# Altium PCB BLE_V3.PcbDoc
Units mil, origin at the board's own origin, x right, y up, seen from the top; angles counter-clockwise.
Board outline 3356.49 x 1990.35 mil, 2 copper layers (Top Layer, Bottom Layer); 15 components, 14 nets, 76 pads, 0 vias.
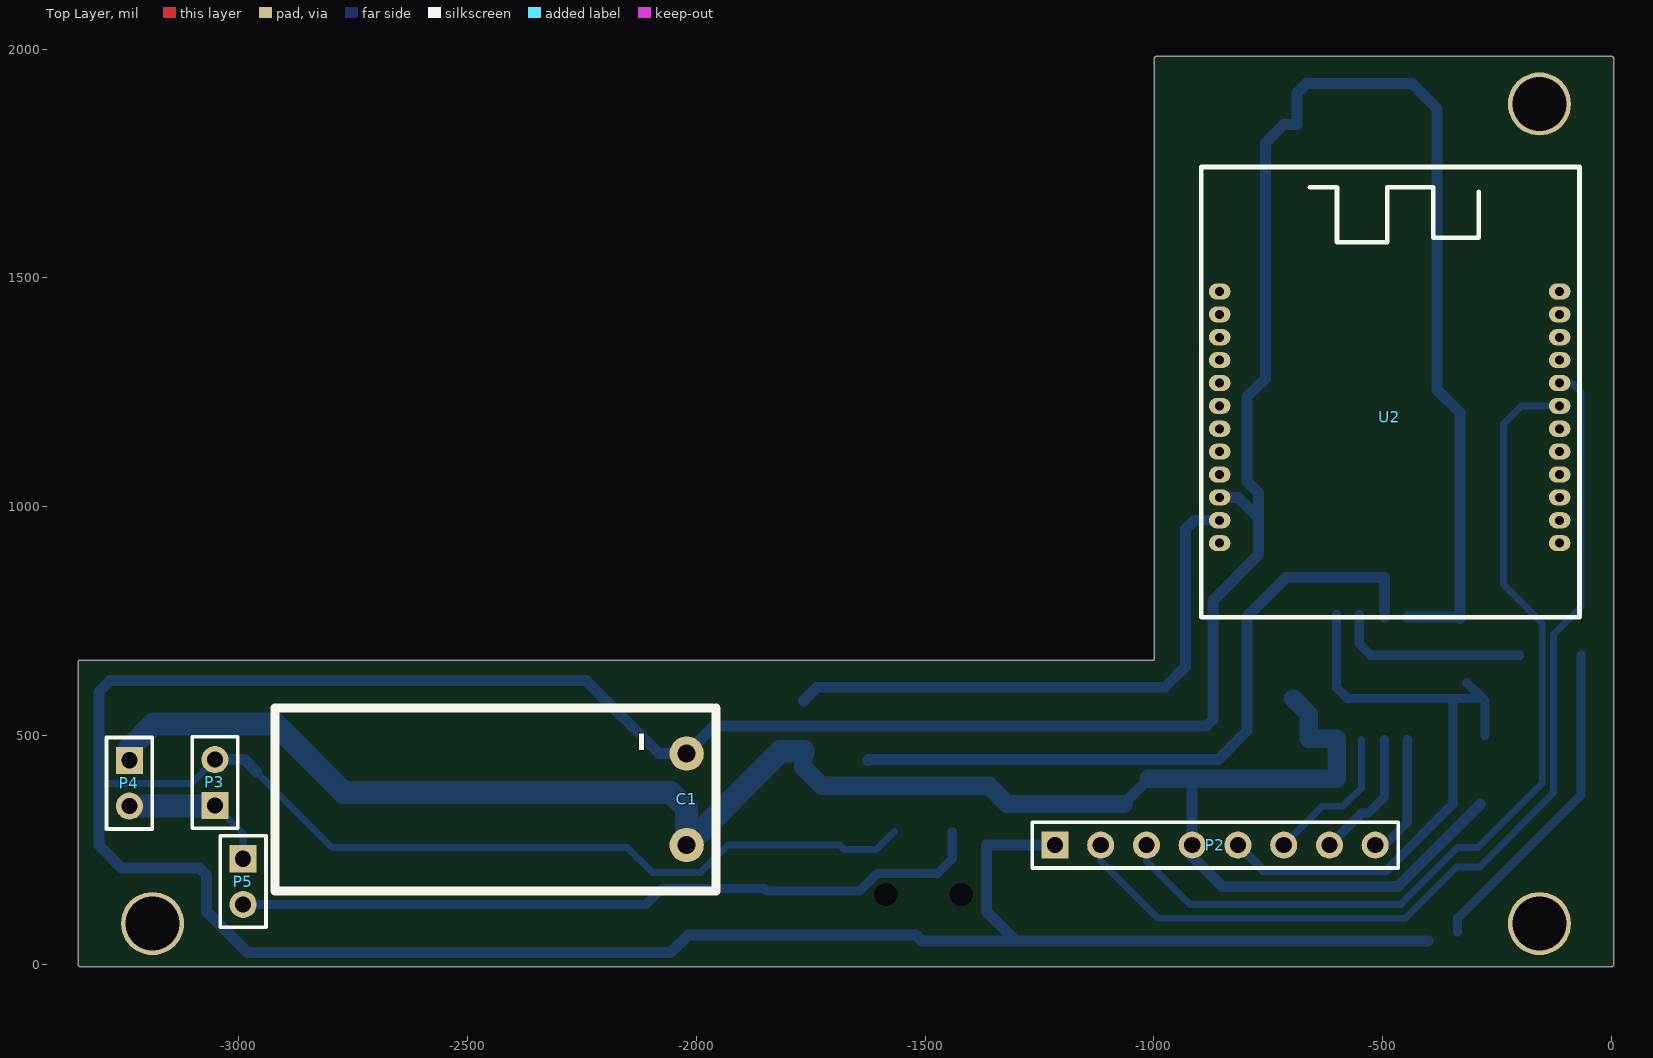
[diagram p0: Top Layer view]
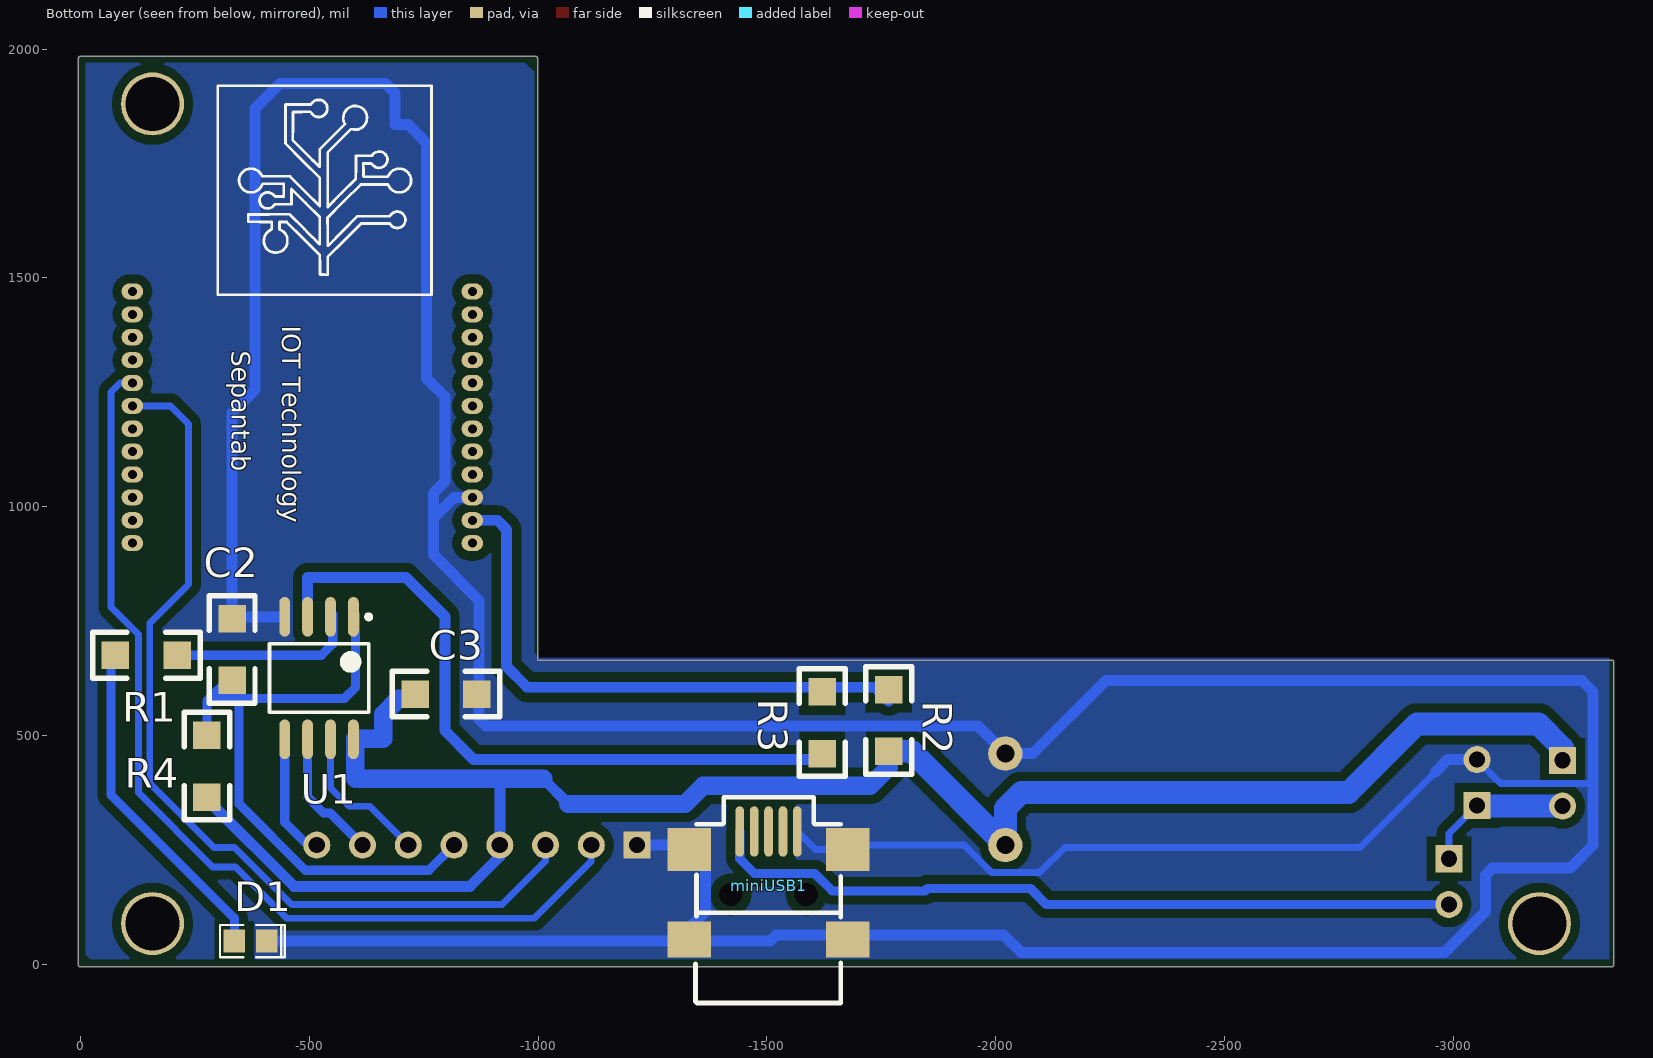
[diagram p1: Bottom Layer view, seen from below]

## Layer stack, top to bottom
Top Solder: solder mask 0.4, Solder Resist, Dk 3.5
Top Layer: signal copper 1.4
Dielectric 1: dielectric 12.6, FR-4, Dk 4.8
Bottom Layer: signal copper 1.4
Bottom Solder: solder mask 0.4, Solder Resist, Dk 3.5

## Board outline
-3351.02,-0.98 -3351.02,659.45 cw(c-3346,659.45) -3346,664.46 -998.65,664.46 -998.65,1979.33 cw(c-993.64,1979.33) -993.64,1984.35 -0.53,1984.35 cw(c-0.53,1979.33) 3.48,1982.35 cw(c0.46,1978.35) 5.47,1978.35 5.47,-0.98 cw(c0.46,-0.98) 0.46,-6 -3346,-6 cw(c-3346,-0.98)

## Design rules (kind name [scope] priority, off if disabled: settings)
Clearance [All] p1: gap=10 ignorepadtopadclearanceinfootprint=FALSE
PolygonConnect [All] p1: connectstyle=Direct reliefconductorwidth=10 reliefentries=4 polygonreliefangle="90 Angle" airgapwidth=10
RoutingVias [All] p1: holewidth=28 width=50 viastyle="Through Hole" minholewidth=28 minwidth=50 maxholewidth=28 maxwidth=50
SolderMaskExpansion [All] p1: expansion=4
Width [All] p1: maxlimit=100 minlimit=10 preferedwidth=20
30 further rules are at their usual default settings.

## Components (designator, comment, footprint, x,y, rotation, side; value= is the part's Value field where it differs from the comment)
C1 "2200UF,16V" RB0.2/0.4-horizantal -2021,260 r270 top
C2 "100NF" 1206 -331,755 r270 bottom value=100pF
C3 "100NF" 1206 -866,590 r0 bottom value=100pF
D1 "LED2" LED-0805 -336,50 r180 bottom
miniUSB1 "N.M." MINI-USB -1440.53,289.84 r180 bottom
P2 "Header 8" HDR1X8 -1216,260 r0 top
P3 "Header 2-battery" HDR1X2 -3052.02,346.85 r90 top
P4 "Header 2-key" HDR1X2 -3239.03,445.28 r270 top
P5 "Header 2-key" HDR1X2 -2990.49,230.16 r270 top
R1 "1K" 1206 -76,675 r180 bottom
R2 "0" 1206 -1766,465 r90 bottom value=1K
R3 "0" 1206 -1621,595 r270 bottom value=1K
R4 "10K" 1206 -276,500 r270 bottom value=1K
U1 "ATtiny45" 8S2_N -521,625 r270 bottom
U2 "NRF52832_1_socket" NRF51822-1-scoket -856,1470 r0 top

## Footprints (in the part's own frame and the unit in brackets; to place one, negate y for a bottom-side part, rotate by r counter-clockwise, add the part's x,y. Pads: shape width x height; smd on the part's side, far side on the other; paste and mask are expansions set on the pad)
8S2_N [mm] "SOP, 8-Leads, Body 5.3x5.3mm, Pitch 1.27mm, IPC Medium Density"
  oval 2.2x0.6 smd: 1(-3.4,1.905) 2(-3.4,0.635) 3(-3.4,-0.635) 4(-3.4,-1.905) 5(3.4,-1.905) 6(3.4,-0.635) 7(3.4,0.635) 8(3.4,1.905)
  silkscreen extent -3.52,-2.75 1.9,2.88, body extent -2.73,-2.75 2.73,2.75, height 2.16
1206 [mil]
  rect 60x60 smd paste-78.74: 1(0,0) 2(135,0)
  silkscreen extent -50,-50 185,50, body extent -20,-35 155,35, height 10
HDR1X2 [mm] "Connector; Header; 2 Position"
  rect 1.5x1.5 hole 0.9: 1(0,0)
  round 1.5 hole 0.9: 2(2.54,0)
  silkscreen extent -1.27,-1.27 3.81,1.27
HDR1X8 [mm] "Connector; Header; 8 Position"
  rect 1.5x1.5 hole 0.9: 1(0,0)
  round 1.5 hole 0.9: 2(2.54,0) 3(5.08,0) 4(7.62,0) 5(10.16,0) 6(12.7,0) 7(15.24,0) 8(17.78,0)
  silkscreen extent -1.27,-1.27 19.05,1.27
LED-0805 [mm]
  rect 1.2x1.27 smd paste-2: 1(0,0) 2(1.8,0)
  silkscreen extent -0.8,-0.9 2.8,0.9
MINI-USB [mm]
  oval 0.483x2.8 smd paste-0.025: 1(0,0) 2(0.8,0) 3(1.6,0) 4(2.4,0) 5(3.2,0)
  rect 2.4x2.4 smd: 6(6,-1) 7(-2.8,-1)
  rect 2.4x2 smd: 8(-2.8,-6) 9(6,-6)
  round 0 hole 1.3: 10(3.7,-3.5) 11(-0.5,-3.5)
  silkscreen extent -2.46,-9.52 5.6,1.9
NRF51822-1-scoket [mm]
  oval 1.2x0.9 hole 0.5: 1(0,0) 2(0,-1.27) 3(0,-2.54) 4(0,-3.81) 5(0,-5.08) 6(0,-6.35) 7(0,-7.62) 8(0,-8.89) 9(0,-10.16) 10(0,-11.43) 11(0,-12.7) 12(0,-13.97) 25(18.87,-13.97) 26(18.87,-12.7) 27(18.87,-11.43) 28(18.87,-10.16) 29(18.87,-8.89) 30(18.87,-7.62) 31(18.87,-6.35) 32(18.87,-5.08) 33(18.87,-3.81) 34(18.87,-2.54) 35(18.87,-1.27) g(18.87,0)
  silkscreen extent -1.02,-18.09 19.98,6.91, body extent -1.02,-18.03 20.07,6.86, height 4
RB0.2/0.4-horizantal [mm]
  round 1.905 hole 1: 1(0,0) 2(-5.08,0)
  silkscreen extent -7.62,-22.86 2.54,1.63

## Part data
C1: library part "CAPACITOR POL", "Aluminum capacitor", brand=nichicon, MOQ/P=1.8, Stock Code=1102-124-1104, U/P=3
C2 C3: library part Cap, "Capacitor", LatestRevisionDate=17-Jul-2002, LatestRevisionNote="Re-released for DXP Platform.", PackageDescription="Radial Cap, Thru-Hole; 2 Leads; 0.3 in Pin Spacing", PackageReference=RAD-0.3, Published=8-Jun-2000, Publisher="Altium Limited"
D1: "Typical RED, GREEN, YELLOW, AMBER GaAs LED", LatestRevisionDate=17-Jul-2002, LatestRevisionNote="Re-released for DXP Platform.", PackageDescription="SM LED; 2 Flat Leads", PackageReference=3.2X1.6X1.1, PackageVersion=Feb-2002, Published=8-Jun-2000, Publisher="Altium Limited"
miniUSB1: library part USB_A/B_0, "USB connector", Text Field1=60, Text Field2=80
P2: "Header, 8-Pin", LatestRevisionDate=17-Jul-2002, LatestRevisionNote="Re-released for DXP Platform.", Publisher="Altium Limited"
P3 P4 P5: library part "Header 2", "Header, 2-Pin", LatestRevisionDate=17-Jul-2002, LatestRevisionNote="Re-released for DXP Platform.", Publisher="Altium Limited"
R1 R2 R3 R4: library part Res1, "Resistor", LatestRevisionDate=17-Jul-2002, LatestRevisionNote="Re-released for DXP Platform.", PackageDescription="Axial Device, Thru-Hole; 2 Leads; 0.3 in Pin Spacing", PackageReference=AXIAL-0.3, Published=8-Jun-2000, Publisher="Altium Limited"
U1: library part ATtiny13A-SU, "8-bit AVR Microcontroller, 1.8-5.5V, 1KB Flash, 64 Bytes EEPROM, 64 Bytes SRAM, 8-pin SOIC, Industrial Grade (-40°C to 85°C), Pb-Free", Supplier Part Number 1=ATTINY13A-SU-ND, ComponentLink1Description="Manufacturer Link", ComponentLink1URL=http://www.atmel.com/products/avr/default.asp?, ComponentLink2Description="ATtiny13A Datasheet", ComponentLink2URL=http://www.atmel.com/dyn/resources/prod_documents/doc8126.pdf, ComponentLink3Description="ATtiny13A Summary", ComponentLink3URL=http://www.atmel.com/dyn/resources/prod_documents/8126S.pdf, ComponentLink4Description="Atmel.com Home", ComponentLink4URL=http://www.atmel.com, DatasheetVersion="revD, Nov-2009", PackageDescription="8-Lead, 0.208\" Body, Plastic Small Outline Package (EIAJ)", PackageReference=8S2, PackageVersion="revF, Apr-2008", Published=1-Apr-2010, Publisher="Altium Limited", Supplier 1=Digi-Key, Supplier 2=Farnell, Supplier 3=Mouser, Supplier Part Number 2=1704568, Supplier Part Number 3=556-ATTINY13A-SU

## Free pads (board coordinates)
  round 137.8 hole 118.11: 1(-3188.52,88.58) 1(-157.02,88.58) 1(-157.02,1879.92)

## Nets (pads, with @x,y where several pads share a name; then routed paths per layer and width w, separated by ;. In a path a pad name is that pad's centre, name@x,y a point inside that pad or via, vN(x,y) a via of type N, cw(c..) or ccw(c..) an arc to the next point about the centre after c; other vN are vias at no path point)
BATT: P3.1 P4.2 P5.1 | length 329.8
  Bottom Layer w15: P3.1 -2991,285.83 -2991,230.67 P5.1
  Bottom Layer w50: P4.2 -3053.6,345.28 P3.1
GND: C1.2 C2.1 C3.1 D1.2 miniUSB1.5 miniUSB1.6 miniUSB1.7 miniUSB1.8 miniUSB1.9 P2.1 P3.2 U1.4 U2.10 | length 11420.6
  Bottom Layer w15: -3306,395 -3103.87,395 P3.2 ; -2961,420 -2796,255 -2151,255 -2096,200 -1991,200 -1930.53,260.47 -1686.75,260.47 miniUSB1.6 -1605.88,250.47 miniUSB1.5
  Bottom Layer w24: P3.2 -2987.85,446.85 -2961,420 ; P2.1 -1366,260 -1366,115 miniUSB1.8@-1301,50 ; U2.10 -816,1020 -771,975 ; U1.4 -334.86,758.86 C2.1 -331,1205 -381,1255 -381,1870 -436,1925 -666,1925 -686.87,1904.13 -686.87,1835 -716,1835 -756,1795 -756,1280 -796,1240 -796,1055 -771,1030 -771,975 ; D1.2@-401,50 D1.2 miniUSB1.8@-1301,50 ; miniUSB1.8@-1301,50 -1506.67,50 -1520.29,63.62 -2017.38,63.62 -2056,25 -2981,25 -3071,115 -3071,195 -3086,210 -3256,210 -3306,260 -3306,395 -3306,595 -3281,620 -2241,620 -2081,460 C1.2 -1961,520 -886,520 -871,535 -871,795 -771,895 -771,975
LED: R1.2 U1.2 | length 424.2
  Bottom Layer w20: U1.2@-551,763.86 -551,700 -526,675 R1.2@-201,675
MISO: P2.7 U1.6 | length 289.6
  Bottom Layer w20: P2.7 -546,330 -531,330 -496,365 U1.6
MOSI: P2.8 U1.5 | length 258.9
  Bottom Layer w20: P2.8@-501,255 -446,310 U1.5
NetD1_1: D1.1 R1.1 | length 716.8
  Bottom Layer w20: D1.1@-336,70 -336,100 -66,370 R1.1@-66,675
RESET: C2.2 P2.5 R4.1 U1.1 | length 1403.3
  Bottom Layer w20: P2.5 -761,205 -491,205 -346,350 -346,580.71 ; U1.1@-601,763.86 -601,605 -576.71,580.71 -346,580.71 ; C2.2@-316,615 -286,585 ; R4.1 -276,575 -286,585 ; -346,580.71 -286,580.71 -286,585
SCK: P2.6 U1.7 | length 327.9
  Bottom Layer w15: P2.6 -631,345 -586,345 -546,385 U1.7
SWDCLK: P2.2 U2.32 | length 2145.9
  Bottom Layer w15: P2.2 -1116,225 -991,100 -451,100 -338.5,212.5 -288.5,212.5 -126,375 -126,720 -66,780 -66,1250 -86,1270 U2.32
SWDIO: P2.3 U2.31 | length 2008.8
  Bottom Layer w15: P2.3 -1016,225 -921,130 -461,130 -336,255 -291,255 -151,395 -151,745 -236,830 -236,1180 -196,1220 U2.31
VBUS: miniUSB1.1 P5.2 | length 1655
  Bottom Layer w20: P5.2 -2110.84,130.16 -2076,165 -1851,165 -1846,160 -1642.72,160 -1605.08,197.64 -1473.36,197.64 -1440.53,230.47 miniUSB1.1
VCC: C1.1 C3.2 P2.4 P4.1 R2.1 R4.2 U1.8 | length 4173.3
  Bottom Layer w24: -1066,350 -1011,405 ; -911,405 -916,400 P2.4 -916,235 -851,170 -466,170 R4.2@-286,350
  Bottom Layer w40: R2.1 -1766,430 -1726,390 -1361,390 -1321,350 -1091,350 -1066,350 ; -1011,405 -911,405 -601,405 -599.94,406.06 -599.94,492.13 -661,492.13 -661,545.87 -695.13,580
  Bottom Layer w50: P4.1 -3239.03,471.97 -3186,525 -2921,525 -2771,375 -2056,375 -2021,340 C1.1 -1816,465 R2.1
VCC-NRF: R2.2 R3.1 U2.11 | length 1249.4
  Bottom Layer w24: R2.2@-1766,575 -1736,605 -976,605 -931,650 -931,950 -911,970 U2.11
VCC-NRF-in: R3.2 U1.3 | length 1528.3
  Bottom Layer w24: R3.2@-1626,445 -1624,447 -859,447 -796,510 -796,760 -711,845 -496,845 U1.3
pads on no net: miniUSB1.2 miniUSB1.3 miniUSB1.4 miniUSB1.10 miniUSB1.11 U2.1 U2.2 U2.3 U2.4 U2.5 U2.6 U2.7 U2.8 U2.9 U2.12 U2.25 U2.26 U2.27 U2.28 U2.29 U2.30 U2.33 U2.34 U2.35 U2.g

## Polygon pours and split planes (outlines as drawn)
GND on Bottom Layer "MidLayer1-No Net" (solid, remove dead copper, pour order 34): -971,1970 -11,1970 -11,20 -21,10 -3341,10 -3341,670 -1001,670 -991,680 -991,1950

## Silkscreen, mask and mechanical layers (free items; w line width, h text height)
Bottom Overlay:
  drawing of 274 lines, arcs and shapes, not listed
  text "IOT Technology" at -426,1395 h70 r90
  text "Sepantab" at -316,1340 h70 r90
Bottom Solder:
  rectangle: -516,950 -286,1420
  rectangle: -786,1445 -271,1940
Mechanical 1:
  lines w10: -0.53,1979.33 -993.64,1979.33 -993.64,675 -3346,675 -3346,-0.98 0.46,-0.98 0.46,1980

## Text inside footprints (layer, text, board x,y; h text height)
C1: Top Overlay "-" at -2156,510 h100 r270